# Altium PCB 88E1512_1000M_SFP_1027.PcbDoc (part 2 of 2)
Units mm, origin at the board's own origin, x right, y up, seen from the top; angles counter-clockwise.
Board outline 50 x 100 mm, 2 copper layers (Top Layer, Bottom Layer); 170 components, 153 nets, 597 pads, 463 vias.
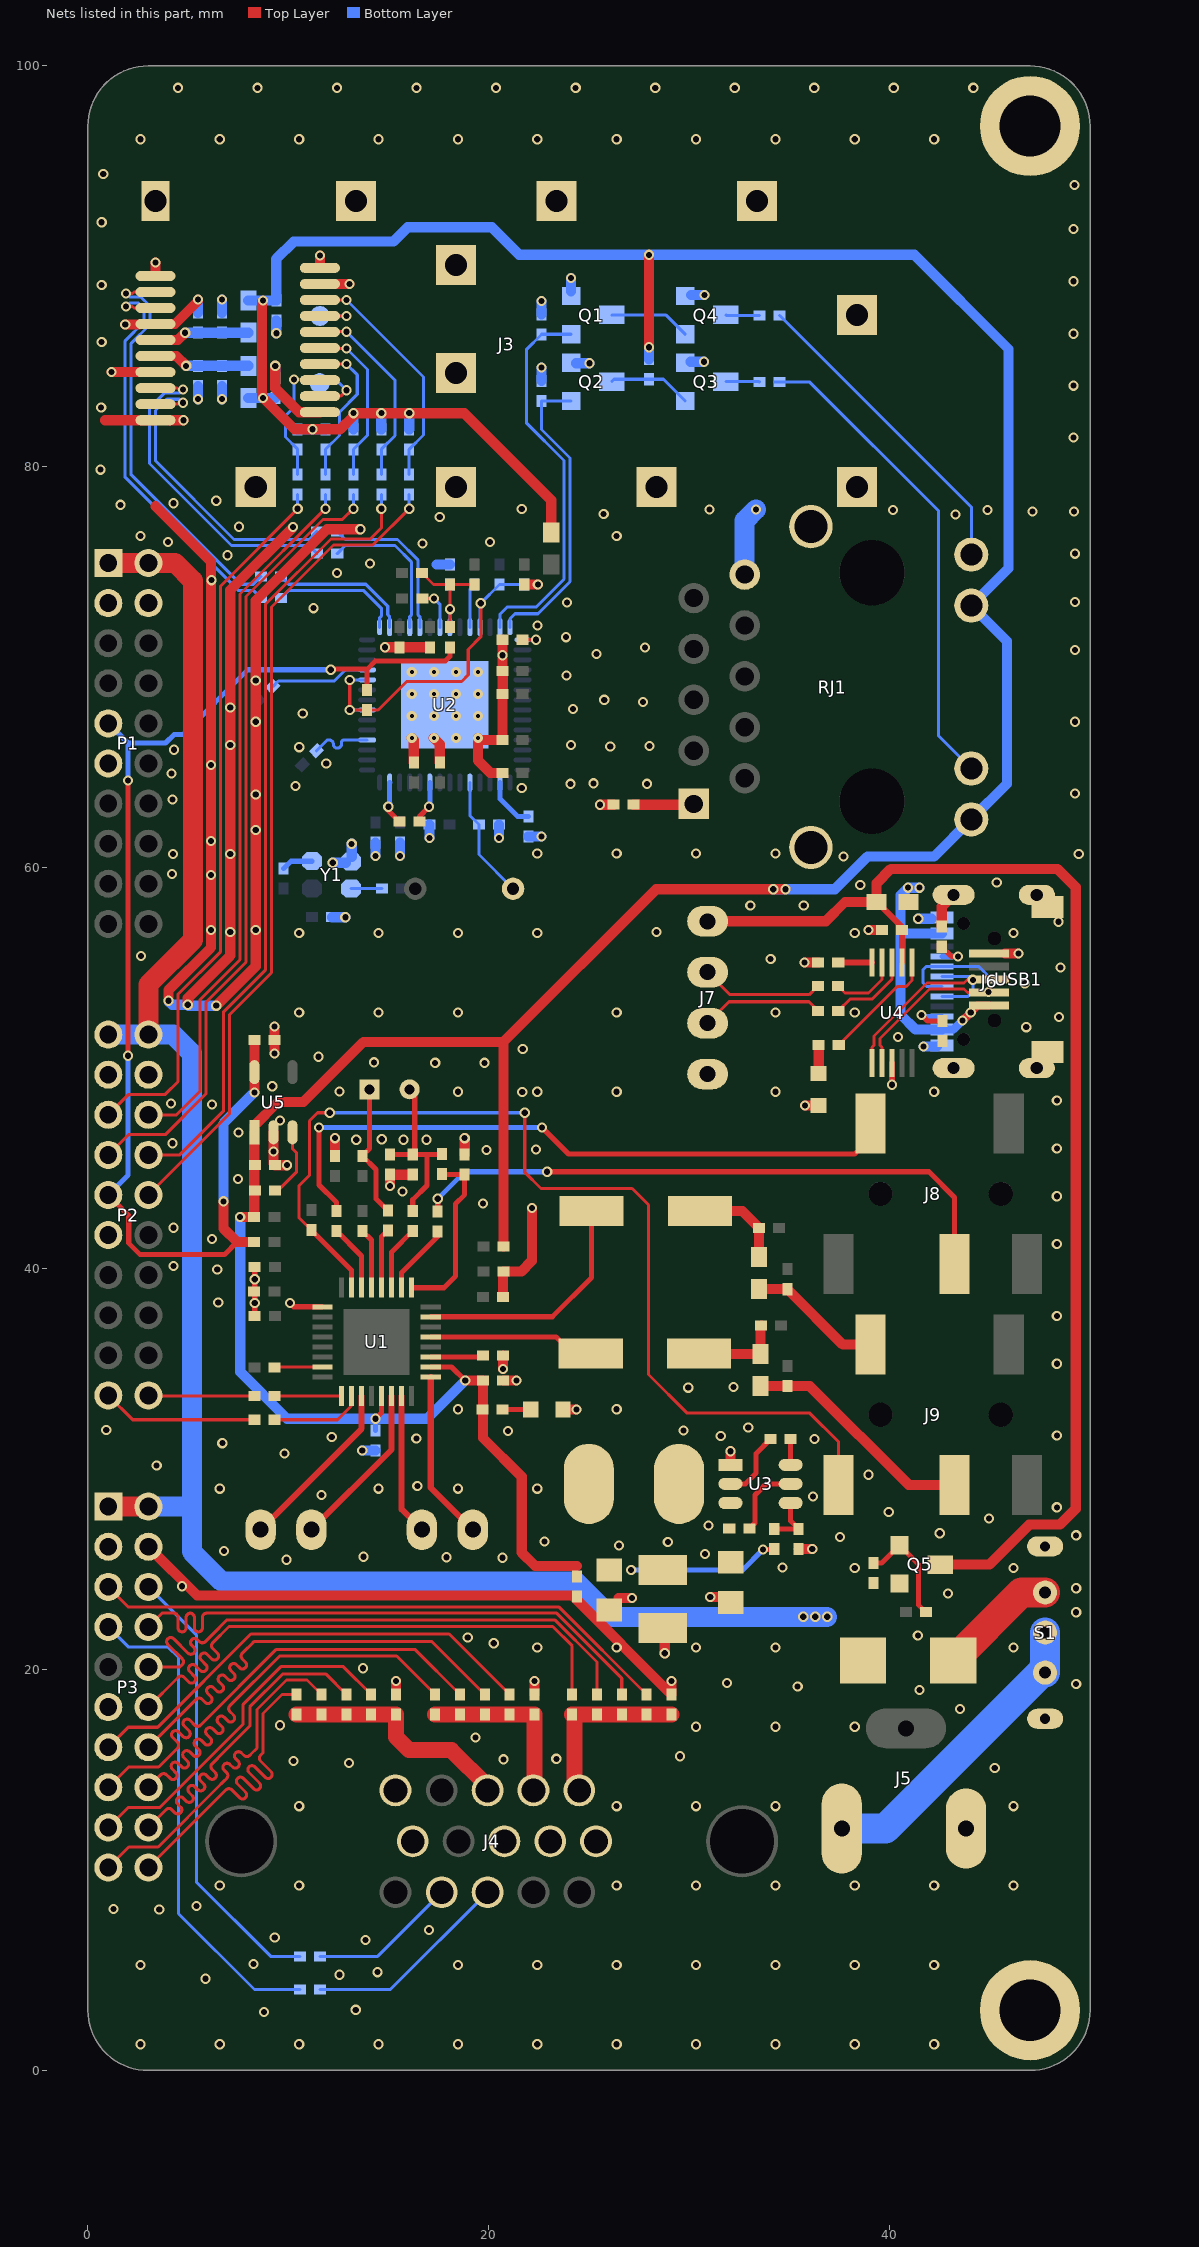
[diagram p2: the nets of this part, all layers, seen from the top]

## Via types
v1: diameter 0.508, hole 0.305, Top Layer to Bottom Layer, tented both sides, 447 vias
v2: diameter 0.5, hole 0.2, Top Layer to Bottom Layer, tented both sides, 16 vias

## Nets (pads, with @x,y where several pads share a name; then routed paths per layer and width w, separated by ;. In a path a pad name is that pad's centre, name@x,y a point inside that pad or via, vN(x,y) a via of type N, cw(c..) or ccw(c..) an arc to the next point about the centre after c; other vN are vias at no path point) (continued)
GND: C1.2 C2.2 C3.2 C4.1 C5.1 C6.1 C12.1 C13.1 C18.1 C19.1 C23.1 C24.1 C25.1 C26.1 C28.1 C29.1 C30.1 C31.1 C32.1 C33.1 C34.1 C35.2 C36.2 C37.1 C38.1 C40.1 C41.1 C43.2 C44.2 C45.1 C46.2 C47.2 C48.1 C49.2 C50.2 C51.1 C52.1 C53.1 C54.1 D2.2 D3.2 H1.1 H2.1 J3.0 J3.1 J3.9 J3.10 J3.11 J3.14 J3.17 J3.20 J4.5 J4.6 J4.7 J4.8 J4.10 J5.2 J6.1 J6.2 J6.3 J6.4 J6.A1B12 J6.B1A12 J7.4 P1.3 P1.4 P1.11 P2.3 P2.4 P2.11 P3.3 P3.4 P3.11 Q1.2 Q2.2 Q3.2 Q4.2 R2.1 R10.2 R20.1 R23.1 R26.1 R44.1 R45.1 R51.1 R52.1 R53.2 R60.1 R62.1 R63.1 RJ1.P10 RJ1.SHIELD0 RJ1.SHIELD1 S1.0 U1.9 U2.57 U3.1 U4.3 U5.2 USB1.5 USB1.6 USB1.7 Y1.2 | length 192.3
  Top Layer w0.254: C6.1@8.322,37.643 v1(8.322,38.278) v1(8.322,39.472) C4.1@8.322,40.081 ; v1(10.084,38.278) 10.264,38.097 U1.9@11.702,38.097
  Top Layer w0.3: v1(40.107,49.174) 40.107,49.124 40.116,49.114 U4.3@40.116,50.267
  Top Layer w0.508: 0.866,82.324 J3.20@3.372,82.324 ; v1(1.183,84.724) J3.17@3.372,84.724 ; v1(1.864,87.097) J3.14@2.54,87.097 ; P3.4@3.016,26.125 5.443,23.698 24.165,23.698 R20.1@29.108,18.755 v1(29.108,19.431) ; 3.372,78.035 6.138,75.269 v1(6.138,65.126) ; J3.14@3.372,87.124 4.345,87.124 5.491,88.269 v1(5.491,88.355) ; J3.11@3.372,89.524 v1(3.372,90.2) ; v1(4.013,53.365) 4.013,53.888 6.138,56.013 v1(6.138,56.896) v1(6.138,59.639) v1(6.138,61.341) v1(6.138,65.126) ; J3.20@4.089,82.321 v1(4.766,82.321) ; v1(4.978,53.162) 4.978,53.489 7.102,55.613 v1(7.102,56.794) v1(7.102,60.681) v1(7.102,66.116) v1(7.102,67.996) ; v1@6.138,65.176 v1(6.138,65.126) ; v1(6.401,53.119) 8.37,55.088 v1(8.37,56.896) v1(8.37,61.874) v1(8.37,63.652) ; v1@7.102,68.174 v1(7.102,67.996) ; v1@8.37,63.779 v1(8.37,63.652) ; v1@9.254,46.025 v1(9.254,45.847) ; U5.2@9.254,46.803 v1(9.254,45.847) ; v1(9.306,50.733) C50.2@9.306,51.41 v1(9.306,52.086) ; v1(9.347,85.039) 9.347,83.922 10.545,82.724 J3.1@11.572,82.724 ; v1(9.931,45.161) C49.2@9.331,45.161 9.254,45.238 v1(9.254,45.847) ; v1(10.236,76.992) 7.102,73.858 v1(7.102,67.996) ; J3.9@11.572,89.124 11.576,89.129 v1(13.056,89.129) ; J3.10@11.572,89.924 v1(11.572,90.54) ; R10.2@12.319,45.61 v1(12.319,46.507) ; v1(13.59,76.886) 11.924,76.886 8.37,73.333 v1(8.37,69.342) v1(8.37,67.285) v1(8.37,63.652) ; v1(14.813,70.998) C30.1@15.555,70.998 C32.1@17.055,70.998 ; v1(15.062,44.12) R2.1@15.062,44.687 C3.2@16.205,44.687 ; R26.1@15.367,18.755 v1(15.367,19.431) ; v2(16.155,66.473) 16.256,66.372 C31.1@16.256,65.245 ; v2(17.255,66.473) 17.555,66.173 C53.1@17.555,65.248 ; C2.2@18.796,45.704 v1(18.796,46.507) ; R51.1@20.68,71.373 v1(20.68,70.6) 20.68,69.828 C28.1@20.684,69.825 20.692,69.817 C54.1@20.692,68.656 20.68,68.645 C40.1@20.68,66.373 19.555,66.373 v2(19.455,66.473) 19.455,65.355 20.091,64.719 C29.1@20.684,64.719 ; C51.1@20.71,34.417 v1(21.387,34.417) ; v1(20.71,34.985) C1.2@20.71,35.662 ; C12.1@20.71,38.583 20.71,39.827 C13.1@20.736,39.853 21.615,39.853 22.149,40.386 v1(22.149,43.028) ; C41.1@21.768,74.125 v1(22.444,74.125) ; R23.1@22.276,18.755 v1(22.276,19.431) ; D2.2@23.698,32.969 v1(24.375,32.969) ; v1(25.544,63.144) C36.2@26.221,63.144 ; 26.467,23.571 v1(27.143,23.571) ; v1(28.778,20.812) C46.2@28.778,21.488 ; v1(31.048,23.622) C43.2@31.725,23.622 ; U3.1@32.055,30.211 v1(32.055,30.887) ; R60.1@35.458,26.018 v1(36.135,26.018) ; v1(35.755,55.27) C47.2@36.432,55.27 ; v1(35.773,48.133) D3.2@36.449,48.133 ; v1(38.938,56.896) C48.1@39.615,56.896 ; R62.1@42.596,57.058 42.596,58.053 J6.1@43.188,58.645 ; USB1.5@45.745,55.728 v1(46.422,55.728)
  Bottom Layer w0.508: v1(4.013,53.365) 4.013,53.34 4.191,53.162 v1(4.978,53.162) 5.022,53.119 v1(6.401,53.119) ; v1(5.491,83.375) C26.1@5.491,84.039 ; C19.1@5.491,87.69 v1(5.491,88.355) ; v1(6.694,83.375) C25.1@6.694,84.039 ; C18.1@6.694,87.69 v1(6.694,88.355) ; C24.1@9.347,84.439 v1(9.347,85.039) ; v1(9.398,86.665) C23.1@9.398,87.29 ; C35.2@12.176,57.531 v1(12.841,57.531) ; v1(12.213,60.249) Y1.2@12.878,60.249 ; Y1.2@13.157,60.528 v1(13.157,61.193) ; v1(13.686,30.928) C52.1@14.351,30.928 ; v1(14.351,60.591) C34.1@14.351,61.255 ; v1(15.57,60.591) C33.1@15.57,61.255 ; v1(17.034,61.489) C37.1@17.034,62.154 ; 17.395,75.125 R53.2@18.059,75.125 ; v1(20.507,61.489) C38.1@20.507,62.154 ; R52.1@21.971,61.56 v1(22.636,61.56) ; R44.1@22.631,84.287 v1(22.631,84.951) ; R45.1@22.631,87.605 v1(22.631,88.269) ; Q1.2@24.105,88.748 v1(24.105,89.412) ; Q2.2@24.359,85.166 v1(25.023,85.166) ; Q3.2@30.074,85.242 v1(30.738,85.242) ; Q4.2@30.099,88.57 v1(30.764,88.57) ; v1(41.423,57.455) J6.A1B12@42.088,57.455 ; v1(41.677,51.079) J6.B1A12@42.342,51.079
  Bottom Layer w1: RJ1.P10@32.766,74.625 32.766,77.318 v1(33.325,77.876)
  other v1: 2.618,1.303 6.578,1.303 10.538,1.303 14.498,1.303 18.458,1.303 22.418,1.303 26.378,1.303 30.338,1.303 34.298,1.303 38.258,1.303 42.218,1.303 8.788,2.921 13.36,3.023 5.867,4.572 12.548,4.775 14.453,4.902 2.618,5.263 18.458,5.263 22.418,5.263 26.378,5.263 30.338,5.263 34.298,5.263 38.258,5.263 42.218,5.263 8.255,5.309 13.843,6.502 9.322,6.629 17.018,7.01 3.556,8.026 1.27,8.052 5.41,8.204 6.578,9.223 10.538,9.223 26.378,9.223 30.338,9.223 34.298,9.223 38.258,9.223 42.218,9.223 46.178,9.223 10.538,13.183 26.378,13.183 30.338,13.183 34.298,13.183 46.178,13.183 45.237,15.088 13.03,15.342 10.262,15.443 20.726,15.519 23.368,15.545 29.54,15.672 19.329,16.612 30.338,17.143 34.298,17.143 38.258,17.143 9.576,17.221 43.51,18.034 41.478,18.974 35.408,19.152 49.301,19.279 31.877,19.329 13.716,20.066 22.418,21.103 26.378,21.103 30.338,21.103 34.298,21.103 46.178,21.103 20.244,21.311 18.948,21.59 41.402,21.692 49.301,22.86 42.904,23.797 49.301,24.054 4.699,24.155 38.258,25.063 46.178,25.063 34.646,25.095 9.906,25.476 20.676,25.578 17.882,25.603 13.741,25.629 30.785,25.756 6.782,25.908 26.492,26.187 28.931,26.365 22.784,26.391 37.516,26.619 49.301,26.695 42.494,26.797 30.963,27.178 44.958,27.534 39.954,27.864 48.336,28.092 36.17,28.626 11.659,28.702 6.578,29.023 14.498,29.023 18.458,29.023 22.418,29.023 16.434,29.159 38.938,29.718 3.429,30.175 9.804,30.785 6.706,31.293 36.246,31.496 16.383,31.521 12.167,31.598 31.572,31.648 48.336,31.674 20.955,31.902 29.718,31.928 0.914,31.953 32.944,32.08 18.458,32.983 26.378,32.983 29.947,34.061 32.207,34.087 48.336,35.255 48.336,37.643 6.502,38.303 6.452,39.954 4.267,40.132 48.336,41.224 6.198,41.478 4.267,42.037 19.71,43.256 48.336,43.612 15.697,43.84 7.493,44.475 19.888,45.923 22.352,45.949 48.336,45.999 4.216,46.253 13.386,46.431 15.748,46.431 16.891,46.431 14.656,46.457 7.518,46.787 9.576,47.396 6.198,48.184 4.14,48.235 48.336,48.387 18.458,48.823 21.666,48.819 22.418,48.823 26.378,48.823 34.298,48.823 42.218,48.823 12.548,48.844 9.195,49.098 17.323,50.267 19.787,50.267 14.275,50.292 11.506,50.571 21.692,50.952 40.411,51.562 46.812,52.045 48.438,52.553 10.538,52.783 14.498,52.783 18.458,52.783 26.378,52.783 34.298,52.783 38.258,52.783 46.736,54.229 48.514,55.016 34.061,55.448 2.642,55.601 10.538,56.743 14.498,56.743 18.458,56.743 22.418,56.743 38.258,56.743 46.178,56.743 28.372,56.794 48.412,57.302 33.045,58.115 35.712,58.115 38.532,59.131 45.339,59.258 4.191,59.69 37.694,60.554 4.242,60.681 49.428,60.681 22.418,60.703 26.378,60.703 30.338,60.703 34.298,60.703 4.216,63.398 49.251,63.703 21.641,63.983 10.363,64.084 24.079,64.186 27.889,64.186 25.222,64.211 4.166,64.694 11.887,65.202 4.293,65.888 10.541,66.015 26.06,66.04 28.016,66.065 24.105,66.116 49.251,67.285 10.719,67.691 24.206,67.92 27.686,68.275 25.756,68.377 23.876,69.596 25.375,70.663 49.251,70.866 27.788,70.993 23.851,71.501 22.428,72.085 11.252,72.949 23.901,73.228 49.251,73.254 6.172,74.346 12.421,74.701 14.072,75.184 6.96,75.59 49.251,75.667 16.688,76.175 3.988,76.251 20.066,76.251 2.618,76.543 26.378,76.543 7.544,77.013 17.551,77.495 43.282,77.622 25.73,77.648 47.117,77.775 49.2,77.775 40.157,77.851 44.882,77.851 31.013,77.876 21.641,77.902 1.626,78.105 4.267,78.181 6.401,78.308 0.635,79.858 49.174,81.458 0.66,82.956 49.174,84.049 0.686,86.233 49.174,86.639 0.686,89.078 49.174,89.256 49.174,91.872 0.686,92.202 49.225,94.056 0.762,94.615 2.618,96.343 6.578,96.343 10.538,96.343 14.498,96.343 18.458,96.343 22.418,96.343 26.378,96.343 30.338,96.343 34.298,96.343 38.258,96.343 42.218,96.343 4.496,98.908 8.463,98.908 12.431,98.908 16.398,98.908 20.366,98.908 24.333,98.908 28.301,98.908 32.268,98.908 36.236,98.908 40.203,98.908 44.171,98.908
  other v2: 18.355,66.473 16.155,67.573 17.255,67.573 18.355,67.573 19.455,67.573 16.155,68.673 17.255,68.673 18.355,68.673 19.455,68.673 16.155,69.773 17.255,69.773 18.355,69.773 19.455,69.773
HP_JD: J9.6 R6.1 U1.7 | length 51.8
  Top Layer w0.152: R6.1@11.151,41.918 10.52,42.549 10.52,44.124 11.049,44.653 11.049,47.371 11.455,47.777 v1(12.065,47.777) ; v1(21.793,47.777) 21.793,44.806 22.606,43.993 27.153,43.993 27.965,43.18 27.965,34.722 29.896,32.791 36.017,32.791 37.438,31.371 J9.6@37.438,29.21
  Top Layer w0.254: R6.1@11.151,41.918 13.152,39.917 U1.7@13.152,39.047
  Bottom Layer w0.152: v1(12.065,47.777) v1(21.793,47.777)
IIC1_SCL: P2.20 R75.2 | length 5.3
  Top Layer w0.152: P2.20@3.016,33.675 3.036,33.655 R75.2@8.314,33.655
IIC1_SDA: P2.19 R76.2 | length 7.8
  Top Layer w0.152: P2.19@1.016,33.675 2.23,32.461 R76.2@8.314,32.461
LED_G: R40.1 RJ1.12 | length 24.4
  Bottom Layer w0.152: R40.1@34.257,84.226 R40.1@34.511,84.226 36.017,84.226 42.443,77.8 42.443,66.576 RJ1.12@44.069,64.95
LED_Y: R41.1 RJ1.14 | length 15.9
  Bottom Layer w0.152: R41.1@34.511,87.554 44.069,77.995 RJ1.14@44.069,75.618
NetC1_1: C1.1 U1.27 | length 2.6
  Top Layer w0.254: U1.27@17.102,35.597 19.646,35.597 C1.1@19.71,35.662
NetC2_1: C2.1 R4.2 U1.1 | length 8.9
  Top Layer w0.254: U1.1@16.152,39.047 17.762,39.047 18.339,39.624 18.339,43.231 18.796,43.688 C2.1@18.796,44.704 R4.2@17.551,44.704
NetC3_1: C3.1 C7.1 MIC1.2 R2.2 R4.1 | length 9
  Top Layer w0.254: R2.2@15.062,45.687 C3.1@16.205,45.687 C3.1@16.307,45.687 ; MIC1.2@16.046,48.946 16.307,48.685 C3.1@16.307,45.687 ; C7.1@16.205,42.885 16.205,43.434 16.92,44.149 16.92,45.687 ; R4.1@17.551,45.704 17.534,45.687 16.92,45.687 ; C3.1@16.307,45.687 16.92,45.687
NetC7_2: C7.2 U1.3 | length 3.3
  Top Layer w0.254: U1.3@15.152,39.047 15.152,40.831 C7.2@16.205,41.885
NetC8_1: C8.1 MIC1.1 R3.1 | length 6.7
  Top Layer w0.254: MIC1.1@14.046,48.946 14.046,45.983 R3.1@13.691,45.628 14.376,44.942 14.376,43.485 C8.1@14.961,42.901
NetC8_2: C8.2 U1.4 | length 3
  Top Layer w0.254: U1.4@14.652,39.047 14.652,41.592 C8.2@14.961,41.901
NetC9_1: C9.1 J8.2 | length 33.6
  Top Layer w0.254: v1(11.532,47.041) 11.532,44.171 12.395,43.307 C9.1@12.395,42.885 ; v1(22.657,47.041) 23.978,45.72 38.252,45.72 39.038,46.505 J8.2@39.038,47.234
  Bottom Layer w0.254: v1(11.532,47.041) v1(22.657,47.041)
NetC9_2: C9.2 U1.6 | length 3.4
  Top Layer w0.254: C9.2@12.395,41.885 13.652,40.628 U1.6@13.652,39.047
NetC10_2: C10.2 U1.5 | length 3
  Top Layer w0.254: C10.2@13.691,41.885 14.152,41.423 U1.5@14.152,39.047
NetC11_1: C11.1 J8.5 | length 30.8
  Top Layer w0.254: C11.1@17.45,42.859 v1(17.45,43.485) ; v1(22.911,44.831) 41.961,44.831 43.238,43.554 J8.5@43.238,40.234
  Bottom Layer w0.254: v1(17.45,43.485) 18.796,44.831 v1(22.911,44.831)
NetC11_2: C11.2 U1.2 | length 3.6
  Top Layer w0.254: U1.2@15.652,39.047 15.652,39.807 17.45,41.605 C11.2@17.45,41.859
NetC14_1: C14.1 U1.31 | length 12.2
  Top Layer w0.254: U1.31@17.102,37.597 23.17,37.597 25.131,39.558 C14.1@25.131,42.875
NetC14_2: C14.2 FB1.1 R9.2 | length 4.7
  Top Layer w0.508: C14.2@30.531,42.875 32.639,42.875 R9.2@33.477,42.037 FB1.1@33.477,40.589
NetC15_1: C15.1 U1.29 | length 8.3
  Top Layer w0.254: U1.29@17.102,36.597 23.347,36.597 24.181,35.763 C15.1@25.088,35.763
NetC15_2: C15.2 FB2.1 R8.2 | length 4.5
  Top Layer w0.508: C15.2@30.488,35.763 30.513,35.738 FB2.1@33.553,35.738 33.553,37.127 R8.2@33.587,37.16
NetC16_2: C16.2 FB2.2 J9.5 | length 11.7
  Top Layer w0.508: FB2.2@33.553,34.138 C16.2@34.9,34.138 36.017,34.138 40.945,29.21 J9.5@43.238,29.21
NetC17_2: C17.2 FB1.2 J9.2 | length 6.7
  Top Layer w0.508: FB1.2@33.477,38.989 34.882,38.989 C17.2@34.9,38.972 37.661,36.21 J9.2@39.038,36.21
NetC36_1: C36.1 RJ1.P1 | length 3
  Top Layer w0.508: C36.1@27.221,63.144 30.183,63.144 RJ1.P1@30.22,63.182
NetC38_2: C38.2 CY1.1 U2.33 | length 6.2
  Bottom Layer w0.152: U2.33@19.055,64.248 19.055,62.606 C38.2@19.507,62.154 19.507,60.655 CY1.1@21.209,58.953
NetC39_1: C39.1 U2.37 | length 2.3
  Top Layer w0.254: C39.1@16.535,62.306 16.535,62.56 v1(17.018,63.043)
  Bottom Layer w0.254: v1(17.018,63.043) 17.07,63.043 17.145,63.118 17.055,63.207 U2.37@17.055,64.248
NetC39_2: C39.2 U2.41 | length 2.2
  Top Layer w0.254: v1(14.986,63.043) 14.986,62.856 C39.2@15.535,62.306
  Bottom Layer w0.254: v1(14.986,63.043) 15.055,63.112 15.055,63.21 15.037,63.228 15.037,64.23 U2.41@15.055,64.248
NetC42_1: C42.1 U3.6 | length 1.3
  Top Layer w0.254: C42.1@35.052,31.496 35.055,31.493 U3.6@35.055,30.211
NetC42_2: C42.2 L3.2 U3.2 | length 3.5
  Top Layer w0.254: U3.2@32.055,29.261 32.791,29.261 33.325,29.794 33.325,30.769 C42.2@34.052,31.496
NetC47_1: C47.1 U4.10 | length 1.7
  Top Layer w0.305: C47.1@37.432,55.27 37.435,55.267 U4.10@39.116,55.267
NetD1_1: D1.1 S1.3 | length 6
  Top Layer w1.5: D1.1@43.169,20.447 46.566,23.844 S1.3@47.752,23.844
NetD2_1: D2.1 R61.2 | length 1.4
  Top Layer w0.254: R61.2@20.693,32.969 D2.1@22.098,32.969
NetD3_1: D3.1 R66.1 | length 1.4
  Top Layer w0.508: D3.1@36.449,49.733 36.457,49.741 R66.1@36.457,51.156
NetJ3_2: J3.2 T1.1 | length 2.9
  Top Layer w0.152: J3.2@11.572,83.524 12.607,83.524 v1(12.903,83.82)
  Bottom Layer w0.152: T1.1@11.557,84.176 12.548,84.176 v1(12.903,83.82)
NetJ3_3: J3.3 R14.1 R15.1 | length 6.5
  Top Layer w0.152: v1(10.287,84.353) 11.542,84.353 J3.3@11.572,84.324
  Bottom Layer w0.152: v1(10.287,84.353) 10.287,82.982 9.855,82.55 9.855,81.483 R14.1@10.465,80.874 R15.1@10.465,79.621
NetJ3_4: J3.4 R11.1 R18.1 | length 7.7
  Top Layer w0.152: J3.4@11.572,85.124 v1(12.899,85.124)
  Bottom Layer w0.152: R18.1@11.855,79.621 R11.1@11.855,80.874 12.548,81.566 12.548,82.728 13.437,83.617 13.437,84.586 v1(12.899,85.124)
NetJ3_5: J3.5 R12.1 R21.1 | length 8.3
  Top Layer w0.152: J3.5@11.572,85.924 11.593,85.903 v1(12.899,85.903)
  Bottom Layer w0.152: v1(12.899,85.903) 13.945,84.857 13.945,81.572 R12.1@13.246,80.874 R21.1@13.246,79.621
NetJ3_6: J3.6 R27.1 R73.1 | length 9.7
  Top Layer w0.152: J3.6@11.572,86.724 11.58,86.716 11.606,86.741 v1(12.899,86.741)
  Bottom Layer w0.152: v1(12.899,86.741) 15.316,84.324 15.316,81.553 R73.1@14.637,80.874 R27.1@14.637,79.621
NetJ3_7: J3.7 T2.1 | length 2.7
  Top Layer w0.152: J3.7@11.572,87.524 v1(12.899,87.524)
  Bottom Layer w0.152: T2.1@11.572,87.524 v1(12.899,87.524)
NetJ3_8: J3.8 R13.1 R28.1 | length 11.9
  Top Layer w0.152: J3.8@11.572,88.324 v1(12.899,88.324)
  Bottom Layer w0.152: v1(12.899,88.324) 16.739,84.484 16.739,81.585 R13.1@16.027,80.874 R28.1@16.027,79.621
NetJ4_13: J4.13 R35.2 | length 10.4
  Bottom Layer w0.152: R35.2@11.574,4.039 15.088,4.039 J4.13@19.939,8.89
NetJ4_14: J4.14 R39.2 | length 7.4
  Bottom Layer w0.152: R39.2@11.582,5.69 14.453,5.69 J4.14@17.653,8.89
NetJ5_1: J5.1 S1.1 S1.2 | length 15.4
  Bottom Layer w1.5: J5.1@37.608,12.065 39.776,12.065 47.555,19.844 S1.1@47.752,19.844 S1.2@47.752,21.844
NetJ6_A5: J6.A5 R62.2 | length 1.8
  Top Layer w0.254: R62.2@42.596,56.058 43.078,55.575 v1(43.412,55.575)
  Bottom Layer w0.254: J6.A5@42.613,55.575 v1(43.412,55.575)
NetJ6_B5: J6.B5 R63.2 | length 2.2
  Top Layer w0.254: v1(41.58,52.654) 41.885,52.349 R63.2@42.621,52.349
  Bottom Layer w0.254: v1(41.58,52.654) 41.659,52.575 J6.B5@42.613,52.575
NetQ1_3: Q1.3 Q4.1 R37.1 | length 4.1
  Bottom Layer w0.152: Q1.3@26.137,87.579 26.153,87.563 R37.1@27.991,87.563 28.845,87.563 Q4.1@29.794,86.614
NetQ2_3: Q2.3 Q3.1 R36.1 | length 4.2
  Bottom Layer w0.152: Q2.3@26.137,84.252 26.254,84.369 R36.1@27.991,84.369 28.711,84.369 Q3.1@29.794,83.287
NetQ3_3: Q3.3 R40.2 | length 1.7
  Bottom Layer w0.152: Q3.3@31.826,84.252 33.485,84.252 R40.2@33.511,84.226
NetQ4_3: Q4.3 R41.2 | length 1.7
  Bottom Layer w0.152: Q4.3@31.826,87.579 31.852,87.554 R41.2@33.511,87.554
NetQ5_1: Q5.1 R70.1 R71.1 | length 5.5
  Top Layer w0.254: R70.1@39.192,25.308 39.595,25.308 Q5.1@40.488,26.2 41.427,25.26 41.427,23.233 R71.1@41.8,22.86
NetR5_1: R5.1 U1.15 | length 2.4
  Top Layer w0.152: R5.1@9.314,35.077 9.334,35.097 U1.15@11.702,35.097
NetR43_1: R43.1 U2.53 | length 5.1
  Bottom Layer w0.152: R43.1@9.218,69.035 9.5,69.317 12.294,69.317 12.85,69.873 U2.53@13.93,69.873
NetR46_1: R46.1 U2.46 | length 3.2
  Bottom Layer w0.152: R46.1@11.403,65.835 11.938,66.37 12.04,66.37 cw(c12.04,66.167) 12.243,66.167 ccw(c12.446,66.167) 12.446,65.964 ccw(c12.446,66.167) 12.649,66.167 12.649,66.244 cw(c12.774,66.244) 12.774,66.37 13.927,66.37 U2.46@13.93,66.373
NetR47_1: R47.1 U2.7 | length 2.1
  Top Layer w0.152: R47.1@16.68,73.431 v1(17.272,73.431)
  Bottom Layer w0.152: v1(17.272,73.431) 17.555,73.148 U2.7@17.555,71.998
NetR48_1: R48.1 R49.1 R50.1 R68.1 U2.8 | length 5.9
  Top Layer w0.152: R48.1@16.662,74.701 17.239,74.125 R49.1@18.059,74.125 ; R68.1@18.055,71.998 v1(18.055,72.898) 18.055,74.121 R49.1@18.059,74.125 ; R50.1@19.296,74.125 R49.1@18.059,74.125
  Bottom Layer w0.152: U2.8@18.055,71.998 v1(18.055,72.898)
NetR51_2: R51.2 U2.15 | length 1.3
  Top Layer w0.152: R51.2@21.68,71.373 v1(22.353,71.373)
  Bottom Layer w0.152: U2.15@21.68,71.373 v1(22.353,71.373)
NetR52_2: R52.2 U2.30 | length 2.6
  Bottom Layer w0.254: U2.30@20.555,64.248 20.555,63.442 21.438,62.56 R52.2@21.971,62.56
NetR53_1: R53.1 R55.1 U2.10 | length 3.5
  Bottom Layer w0.152: R53.1@18.059,74.125 R55.1@19.296,74.125 19.055,73.885 U2.10@19.055,71.998
NetR54_1: R54.1 Y1.3 | length 1.5
  Bottom Layer w0.152: Y1.3@13.132,58.953 R54.1@14.664,58.953
NetR56_1: R56.1 R57.1 R69.1 U2.11 U2.49 U2.52 | length 17.5
  Top Layer w0.152: v1(13.061,69.373) v1(13.06,67.873) v1(13.06,67.873) R69.1@13.93,67.873 14.482,67.873 15.904,69.295 18.647,69.295 18.974,69.621 18.974,70.891 19.6,71.517 v1(19.6,73.193)
  Bottom Layer w0.152: v1(13.06,67.873) U2.49@13.93,67.873 ; v1(13.061,69.373) U2.52@13.93,69.373 ; U2.11@19.555,71.998 19.555,73.149 v1(19.6,73.193) R56.1@20.532,74.125 R57.1@21.768,74.125
NetR58_2: R58.2 U3.5 | length 3.8
  Top Layer w0.254: R58.2@32.995,27.026 33.274,27.305 33.274,28.702 33.833,29.261 U3.5@35.055,29.261
NetR59_2: R59.2 R60.2 U3.4 | length 2.7
  Top Layer w0.254: R59.2@34.239,27.018 R60.2@35.458,27.018 35.055,27.421 U3.4@35.055,28.311
NetR64_2: R64.2 U4.9 | length 3.5
  Top Layer w0.152: R64.2@37.414,54.102 37.77,53.746 38.938,53.746 39.616,54.424 U4.9@39.616,55.267
NetR65_2: R65.2 U4.8 | length 4.2
  Top Layer w0.152: R65.2@37.432,52.857 38.017,53.442 39.117,53.442 40.116,54.442 U4.8@40.116,55.267
NetR66_2: R66.2 U4.6 | length 5.9
  Top Layer w0.152: R66.2@37.457,51.156 40.378,54.077 40.818,54.077 41.116,54.375 U4.6@41.116,55.267
NetR72_1: R72.1 Y1.1 | length 1.6
  Bottom Layer w0.254: R72.1@9.754,59.953 10.125,60.325 Y1.1@11.176,60.325
NetR74_2: R74.2 U5.3 | length 3.5
  Top Layer w0.152: R74.2@9.331,43.891 9.474,43.891 10.413,44.83 10.413,45.771 10.204,45.981 U5.3@10.204,46.803
NetR75_1: R75.1 U1.17 | length 3.3
  Top Layer w0.152: R75.1@9.314,33.655 9.321,33.647 U1.17@12.652,33.647
NetR76_1: R76.1 U1.18 | length 4.6
  Top Layer w0.152: R76.1@9.314,32.461 12.446,32.461 13.132,33.147 13.132,33.627 U1.18@13.152,33.647
PHY_LED0: Q1.1 R45.2 U2.13 | length 19.3
  Bottom Layer w0.152: U2.13@20.555,71.998 20.555,72.651 20.904,73 22.352,73 23.75,74.397 23.75,80.316 21.869,82.196 21.869,85.843 R45.2@22.631,86.605 22.641,86.614 Q1.1@24.105,86.614
PHY_LED1: Q2.1 R44.2 U2.14 | length 15.3
  Bottom Layer w0.152: U2.14@21.055,71.998 21.055,72.414 21.311,72.669 22.454,72.669 24.054,74.27 24.054,80.442 22.631,81.864 R44.2@22.631,83.287 Q2.1@24.105,83.287
S_IN_N: C27.1 U2.2 | length 7
  Bottom Layer w0.152: C27.1@9.636,74.524 10.018,74.142 13.865,74.142 14.957,73.049 14.957,72.622 15.055,72.524 U2.2@15.055,71.998
S_IN_P: C22.1 U2.1 | length 6.5
  Bottom Layer w0.152: C22.1@9.636,73.457 10.017,73.838 13.739,73.838 14.653,72.923 14.653,72.572 14.555,72.474 U2.1@14.555,71.998
S_OUT_N: C20.1 U2.5 | length 8
  Bottom Layer w0.152: C20.1@12.438,76.784 12.845,76.377 15.442,76.377 16.457,75.362 16.457,72.622 16.555,72.524 U2.5@16.555,71.998
S_OUT_P: C21.1 U2.4 | length 7.5
  Bottom Layer w0.152: C21.1@12.438,75.667 12.845,76.073 15.316,76.073 16.153,75.236 16.153,72.622 16.055,72.524 U2.4@16.055,71.998
SFP_DETECT: P2.8 R27.2 | length 39.8
  Top Layer w0.152: P2.8@3.016,45.675 4.586,45.675 6.756,47.845 6.756,52.793 8.852,54.889 8.852,73.133 12.123,76.403 14.091,76.403 14.637,76.949 v1(14.637,77.91)
  Bottom Layer w0.152: v1@14.637,77.902 v1(14.637,77.91) R27.2@14.637,78.621
SFP_LOS: P2.10 R28.2 | length 41.5
  Top Layer w0.152: P2.10@3.016,43.675 7.06,47.719 7.06,52.667 9.156,54.763 9.156,73.007 12.249,76.099 14.217,76.099 v1(16.027,77.91)
  Bottom Layer w0.152: v1@16.027,77.902 v1(16.027,77.91) R28.2@16.027,78.621
SFP_SCL: P2.7 R21.2 | length 39.7
  Top Layer w0.152: P2.7@1.016,45.675 2.026,46.685 3.859,46.685 5.892,48.718 5.892,53.291 7.888,55.288 7.888,73.532 11.725,77.368 12.692,77.368 v1@13.233,77.91
  Bottom Layer w0.152: v1@13.246,77.902 v1(13.246,77.91) R21.2@13.246,78.621
SFP_SDA: P2.6 R18.2 | length 35.4
  Top Layer w0.152: P2.6@3.016,47.675 4.419,47.675 5.588,48.844 5.588,53.417 7.584,55.414 7.584,73.658 v1@11.836,77.91
  Bottom Layer w0.152: v1@11.855,77.902 v1(11.855,77.91) R18.2@11.855,78.621
SFP_TX_DISABLE: P2.5 R15.2 | length 35.9
  Top Layer w0.152: P2.5@1.016,47.675 2.033,48.692 3.861,48.692 4.495,49.326 4.495,53.688 6.62,55.813 6.62,74.057 v1@10.465,77.902
  Bottom Layer w0.152: v1@10.465,77.902 v1(10.465,77.91) R15.2@10.465,78.621
SIN_N: C27.2 J3.12 | length 20.7
  Top Layer w0.152: v1(1.905,88.654) 2.226,88.654 2.296,88.724 J3.12@3.372,88.724
  Bottom Layer w0.152: v1(1.905,88.654) 2.083,88.476 2.641,88.476 3.098,88.019 3.098,87.098 2.159,86.159 2.159,79.604 7.62,74.142 8.255,74.142 C27.2@8.636,74.524
SIN_P: C22.2 J3.13 | length 20.7
  Top Layer w0.152: v1(1.905,87.994) 2.226,87.994 2.296,87.924 J3.13@3.372,87.924
  Bottom Layer w0.152: v1(1.905,87.994) 2.083,88.172 2.515,88.172 2.794,87.893 2.794,87.224 1.855,86.285 1.855,79.478 7.494,73.838 8.255,73.838 C22.2@8.636,73.457
SOUT_N: C20.2 J3.19 | length 15.5
  Top Layer w0.152: J3.19@3.372,83.124 4.448,83.124 4.518,83.194 v1(4.75,83.194)
  Bottom Layer w0.152: v1(4.75,83.194) 4.572,83.372 3.937,83.372 3.372,82.807 3.372,80.296 7.29,76.377 11.031,76.377 C20.2@11.438,76.784
SOUT_P: C21.2 J3.18 | length 16.5
  Top Layer w0.152: J3.18@3.372,83.924 4.448,83.924 4.518,83.854 v1(4.75,83.854)
  Bottom Layer w0.152: v1(4.75,83.854) 4.572,83.676 3.811,83.676 3.068,82.933 3.068,80.17 7.164,76.073 11.031,76.073 C21.2@11.438,75.667
SPK_LN: J1.2 U1.23 | length 7.1
  Top Layer w0.305: U1.23@15.652,33.647 15.652,27.985 J1.2@16.662,26.975
SPK_LP: J1.1 U1.25 | length 8.5
  Top Layer w0.305: U1.25@17.102,34.597 17.102,29.075 J1.1@19.202,26.975
SPK_RN: J2.2 U1.19 | length 8.8
  Top Layer w0.305: J2.2@8.611,26.975 13.652,32.016 U1.19@13.652,33.647
SPK_RP: J2.1 U1.22 | length 8.3
  Top Layer w0.305: J2.1@11.151,26.975 15.152,30.976 U1.22@15.152,33.647
UART_RXD: J7.3 R65.1 | length 6.2
  Top Layer w0.152: J7.3@30.912,52.248 31.979,53.315 35.974,53.315 R65.1@36.432,52.857
UART_TXD: J7.2 R64.1 | length 6.1
  Top Layer w0.152: J7.2@30.912,54.788 32.029,53.67 35.982,53.67 R64.1@36.414,54.102
USB_5V: FU1.1 J6.A4B9 J6.B4A9 USB1.1 | length 15
  Top Layer w0.4: v1(43.637,52.375) v1(44.044,52.781) 44.044,52.783 44.386,53.125 USB1.1@44.954,53.125
  Top Layer w0.508: FU1.1@40.919,58.318 FU1.1@40.945,58.293
  Bottom Layer w0.4: J6.B4A9@42.613,51.925 43.186,51.925 44.042,52.781 v1(44.044,52.781)
  Bottom Layer w0.508: v1(41.478,59.004) v1(40.919,59.004) 40.538,58.623 40.538,56.718 ; J6.B4A9@42.613,51.925 41.293,51.925 40.538,52.68 40.538,56.718 ; J6.A4B9@42.613,56.725 40.545,56.725 40.538,56.718
USB_UART_N: J6.A7 J6.B7 U4.2 USB1.2 | length 13.8
  Top Layer w0.152: U4.2@39.616,50.267 39.616,51.043 39.518,51.141 39.518,51.481 41.985,53.948 43.705,53.948 43.878,53.775 USB1.2@44.954,53.775 v1(44.933,53.796)
  Bottom Layer w0.152: J6.A7@42.613,54.075 41.835,54.075 41.656,54.254 41.656,54.915 41.816,55.075 J6.B7@42.613,55.075 44.442,55.075 44.933,54.585 v1(44.933,53.796)
USB_UART_P: J6.A6 J6.B6 U4.1 USB1.3 | length 12.1
  Top Layer w0.152: U4.1@39.116,50.267 39.116,51.043 39.214,51.141 39.214,51.607 41.859,54.252 43.705,54.252 43.878,54.425 USB1.3@44.954,54.425
  Bottom Layer w0.152: J6.B6@42.613,53.575 43.898,53.575 44.145,53.823 v1(44.145,54.407) 43.977,54.575 J6.A6@42.613,54.575
USB_VCC: C48.2 FU1.2 J7.1 Q5.3 U4.7 | length 62.9
  Top Layer w0.305: FU1.2@39.345,58.293 40.615,57.023 C48.2@40.615,56.896 40.616,56.895 U4.7@40.616,55.267
  Top Layer w0.508: J7.1@30.912,57.328 36.805,57.328 37.77,58.293 FU1.2@39.345,58.293 39.345,59.233 40.056,59.944 48.36,59.944 49.276,59.028 49.276,28.016 48.489,27.229 46.965,27.229 44.971,25.235 Q5.3@42.52,25.235
VCC_2.5: C50.1 P1.9 P2.9 R67.2 R68.2 R69.2 U5.5 | length 64.3
  Top Layer w0.254: P2.9@1.016,43.675 2.037,42.654 2.037,41.27 2.61,40.696 6.812,40.696 7.442,41.326 ; v1@1.981,64.338 v1(1.998,64.355) ; v1(2.007,50.622) v1@2.007,64.355 ; v1(12.116,69.875) 12.146,69.906 13.93,69.906 ; R69.2@13.93,68.873 13.93,69.906 ; R68.2@18.055,70.998 18.055,70.532 17.831,70.307 14.332,70.307 13.93,69.906
  Top Layer w0.508: v1(6.756,43.358) 6.756,42.012 7.442,41.326 R67.2@8.296,41.326 ; U5.5@8.304,49.803 8.304,51.408 C50.1@8.306,51.41 ; v1(8.306,48.793) U5.5@8.306,49.75
  Bottom Layer w0.254: P2.9@1.016,43.675 2.007,44.666 v1(2.007,50.622) ; P1.9@1.016,67.2 1.998,66.218 ; v1(1.998,64.355) 1.998,66.218 ; v1(12.116,69.875) 7.976,69.875 4.75,66.65 4.301,66.65 3.869,66.218 1.998,66.218
  Bottom Layer w0.508: v1(6.756,43.358) 6.756,47.244 v1(8.306,48.793)
VCC_3.3V: C23.2 C24.2 C44.1 C45.2 C46.1 C49.1 C51.2 C52.2 FB3.2 L1.1 L2.1 L3.1 R1.2 R7.2 R11.2 R12.2 R13.2 R14.2 R36.2 R37.2 R59.1 R61.1 R73.2 R74.1 RJ1.11 RJ1.13 U1.21 U1.26 U5.1 | length 208.8
  Top Layer w0.254: v1(14.351,32.512) 14.652,32.813 U1.21@14.652,33.647 ; U1.26@17.102,35.097 18.141,35.097 v1(18.821,34.417) ; v1(33.68,25.984) 34.206,25.984 R59.1@34.239,26.018
  Top Layer w0.508: v1(7.595,42.57) R1.2@8.296,42.57 8.296,46.795 U5.1@8.304,46.803 8.304,47.13 9.485,48.311 10.744,48.311 13.741,51.308 20.726,51.308 ; v1(8.738,88.29) 8.687,88.24 8.687,83.49 v1(8.738,83.439) 10.303,81.874 v1(11.201,81.874) 12.582,81.874 13.246,82.537 v1(13.246,82.677) v1(14.637,82.677) v1(16.027,82.677) 18.771,82.677 23.114,78.334 FB3.2@23.114,76.733 ; v1(18.821,34.417) C51.2@19.71,34.417 19.71,31.547 21.641,29.616 21.641,25.832 22.301,25.171 24.384,25.171 ; R7.2@20.736,41.097 20.726,41.107 20.726,51.308 ; L3.1@24.528,27.83 24.989,28.291 L3.1@24.989,29.261 ; v1(27.991,85.966) v1(27.991,90.576) ; v1(34.798,58.928) v1(34.188,58.928) 28.346,58.928 20.726,51.308
  Bottom Layer w0.254: C52.2@14.351,31.928 v1(14.351,32.512) ; v1(27.102,24.968) 32.664,24.968 v1(33.68,25.984)
  Bottom Layer w0.508: v1(7.595,42.57) 7.595,34.849 9.931,32.512 v1(14.351,32.512) 16.916,32.512 v1(18.821,34.417) ; L2.1@8.001,83.439 v1(8.738,83.439) C24.2@9.347,83.439 ; L1.1@8.001,88.29 v1(8.738,88.29) C23.2@9.398,88.29 9.398,90.373 10.262,91.237 15.24,91.237 15.951,91.948 20.142,91.948 21.514,90.576 v1(27.991,90.576) 41.224,90.576 45.923,85.877 45.923,74.933 RJ1.13@44.069,73.078 45.847,71.3 45.847,64.188 RJ1.11@44.069,62.41 42.212,60.554 38.887,60.554 37.262,58.928 v1(34.798,58.928) v1(34.188,58.928) ; R14.2@10.465,81.874 v1(11.201,81.874) R11.2@11.855,81.874 ; R12.2@13.246,81.874 v1(13.246,82.677) ; R73.2@14.637,81.874 v1(14.637,82.677) ; R13.2@16.027,81.874 v1(16.027,82.677) ; R36.2@27.991,85.369 v1(27.991,85.966) R37.2@27.991,86.563
VCC_12V: C43.1 D1.2 P1.1 P1.2 P2.1 P2.2 P3.1 P3.2 Q5.2 R58.1 R70.2 U3.3 | length 94.8
  Top Layer w1: P3.1@1.016,28.125 P3.2@3.016,28.125 ; P1.1@1.016,75.2 P1.2@3.016,75.2 4.353,75.2 5.232,74.32 5.232,56.388 3.016,54.172 P2.2@3.016,51.675
  Bottom Layer w1: P2.1@1.016,51.675 P2.2@3.016,51.675 4.256,51.675 5.182,50.749 5.182,28.125 ; P3.2@3.016,28.125 5.182,28.125 ; v1(36.881,22.631) v1(36.284,22.631) v1(35.687,22.631) 26.086,22.631 24.333,24.384 6.68,24.384 5.182,25.883 5.182,28.125
VCC_RX: C18.2 C19.2 J3.15 L1.2 | length 4.8
  Top Layer w0.508: J3.15@3.372,86.324 4.485,86.324 v1(4.851,86.69)
  Bottom Layer w0.508: v1(4.851,86.69) C19.2@5.491,86.69 C18.2@6.694,86.69 L1.2@8.001,86.69
VCC_TX: C25.2 C26.2 J3.16 L2.2 | length 4.8
  Top Layer w0.508: J3.16@3.372,85.524 4.417,85.524 v1(4.902,85.039)
  Bottom Layer w0.508: v1(4.902,85.039) C26.2@5.491,85.039 C25.2@6.694,85.039 L2.2@8.001,85.039
VGA_B: J4.3 R26.2 R33.1 R34.1 R38.1 R42.1 | length 11.9
  Top Layer w0.8: R33.1@10.414,17.755 R34.1@11.652,17.755 R38.1@12.89,17.755 R42.1@14.129,17.755 R26.2@15.367,17.755 15.367,16.637 16.027,15.977 18.136,15.977 19.939,14.173 J4.3@19.939,13.97
VGA_B1: P3.20 R33.2 | length 17.6
  Top Layer w0.152: P3.20@3.016,10.125 5.882,12.991 6.888,13.997 cw(c7.032,13.854) 7.175,13.997 7.571,13.601 ccw(c7.715,13.744) 7.858,13.601 ccw(c7.715,13.744) 7.858,13.888 7.462,14.284 cw(c7.606,14.428) 7.462,14.571 cw(c7.606,14.428) 7.749,14.571 8.271,14.05 ccw(c8.414,14.193) 8.558,14.05 ccw(c8.414,14.193) 8.558,14.337 8.036,14.858 cw(c8.18,15.002) 8.036,15.145 cw(c8.18,15.002) 8.324,15.145 8.845,14.624 ccw(c8.988,14.768) 9.132,14.624 ccw(c8.988,14.768) 9.132,14.911 8.611,15.433 cw(c8.754,15.576) 8.611,15.72 8.738,15.847 8.738,17.805 9.687,18.755 R33.2@10.414,18.755
VGA_B2: P3.19 R34.2 | length 17.6
  Top Layer w0.152: P3.19@1.016,10.125 2.042,11.151 3.505,11.151 6.464,14.11 6.778,14.423 6.921,14.567 ccw(c6.778,14.71) 6.921,14.854 6.796,14.979 cw(c6.939,15.123) 6.796,15.266 cw(c6.939,15.123) 7.083,15.266 7.208,15.141 ccw(c7.352,15.284) 7.495,15.141 ccw(c7.352,15.284) 7.495,15.428 7.37,15.553 cw(c7.513,15.697) 7.37,15.84 cw(c7.513,15.697) 7.657,15.84 7.782,15.715 ccw(c7.926,15.858) 8.07,15.715 8.213,15.858 8.357,16.002 8.433,16.078 8.433,18.009 9.906,19.482 10.925,19.482 R34.2@11.652,18.755
VGA_B3: P3.18 R38.2 | length 17.6
  Top Layer w0.152: P3.18@3.016,12.125 3.612,12.721 3.755,12.864 3.899,13.008 cw(c4.042,12.864) 4.186,13.008 4.336,12.858 ccw(c4.479,13.001) 4.623,12.858 ccw(c4.479,13.001) 4.623,13.145 4.473,13.295 cw(c4.616,13.438) 4.473,13.582 cw(c4.616,13.438) 4.76,13.582 4.91,13.432 ccw(c5.053,13.576) 5.197,13.432 ccw(c5.053,13.576) 5.197,13.719 5.047,13.869 cw(c5.191,14.012) 5.047,14.156 cw(c5.191,14.012) 5.334,14.156 5.484,14.006 ccw(c5.627,14.15) 5.771,14.006 ccw(c5.627,14.15) 5.771,14.293 5.621,14.443 cw(c5.765,14.587) 5.621,14.73 cw(c5.765,14.587) 5.908,14.73 6.058,14.58 ccw(c6.202,14.724) 6.345,14.58 ccw(c6.202,14.724) 6.345,14.867 6.195,15.017 cw(c6.339,15.161) 6.195,15.304 6.761,15.87 8.077,17.186 8.077,18.136 9.728,19.787 11.858,19.787 R38.2@12.89,18.755
VGA_B4: P3.17 R42.2 | length 17.6
  Top Layer w0.152: P3.17@1.016,12.125 1.997,13.106 3.567,13.106 7.747,17.286 7.747,18.263 9.627,20.142 12.741,20.142 R42.2@14.129,18.755
VGA_G: J4.2 R23.2 R29.1 R30.1 R31.1 R32.1 | length 8.8
  Top Layer w0.8: R29.1@17.323,17.755 R30.1@18.561,17.755 R31.1@19.799,17.755 R32.1@21.038,17.755 R23.2@22.276,17.755 22.276,14.021 J4.2@22.225,13.97
VGA_G1: P3.16 R29.2 | length 23.6
  Top Layer w0.152: P3.16@3.016,14.125 3.064,14.173 3.637,14.746 cw(c3.781,14.602) 3.924,14.746 4.101,14.569 ccw(c4.245,14.712) 4.389,14.569 ccw(c4.245,14.712) 4.389,14.856 4.211,15.033 cw(c4.355,15.177) 4.211,15.32 cw(c4.355,15.177) 4.498,15.32 4.676,15.143 ccw(c4.819,15.286) 4.963,15.143 ccw(c4.819,15.286) 4.963,15.43 4.785,15.607 cw(c4.929,15.751) 4.785,15.894 cw(c4.929,15.751) 5.072,15.894 5.25,15.717 ccw(c5.393,15.86) 5.537,15.717 ccw(c5.393,15.86) 5.537,16.004 5.359,16.181 cw(c5.503,16.325) 5.359,16.468 cw(c5.503,16.325) 5.647,16.468 5.824,16.291 ccw(c5.967,16.435) 6.111,16.291 ccw(c5.967,16.435) 6.111,16.578 5.934,16.756 cw(c6.077,16.899) 5.934,17.043 cw(c6.077,16.899) 6.221,17.043 6.398,16.865 ccw(c6.542,17.009) 6.685,16.865 ccw(c6.542,17.009) 6.685,17.152 6.508,17.33 cw(c6.651,17.473) 6.508,17.617 cw(c6.651,17.473) 6.795,17.617 6.972,17.439 ccw(c7.116,17.583) 7.259,17.439 ccw(c7.116,17.583) 7.259,17.727 7.082,17.904 cw(c7.226,18.047) 7.082,18.191 9.567,20.676 15.402,20.676 R29.2@17.323,18.755
VGA_G2: P3.15 R30.2 | length 23.6
  Top Layer w0.152: P3.15@1.016,14.125 2.029,15.138 3.531,15.138 4.47,16.078 ccw(c4.327,16.222) 4.47,16.365 4.231,16.604 cw(c4.375,16.748) 4.231,16.891 cw(c4.375,16.748) 4.518,16.891 4.757,16.652 ccw(c4.901,16.796) 5.045,16.652 ccw(c4.901,16.796) 5.045,16.939 4.806,17.179 cw(c4.949,17.322) 4.806,17.466 cw(c4.949,17.322) 5.093,17.466 5.332,17.227 ccw(c5.475,17.37) 5.619,17.227 5.626,17.234 9.398,21.006 16.31,21.006 R30.2@18.561,18.755
VGA_G3: P3.14 R31.2 | length 23.6
  Top Layer w0.152: P3.14@3.016,16.125 4.609,17.718 5.407,18.516 cw(c5.55,18.372) 5.694,18.516 5.844,18.366 ccw(c5.988,18.509) 6.131,18.366 ccw(c5.988,18.509) 6.131,18.653 5.981,18.803 cw(c6.125,18.947) 5.981,19.09 cw(c6.125,18.947) 6.268,19.09 6.418,18.94 ccw(c6.562,19.083) 6.706,18.94 ccw(c6.562,19.083) 6.706,19.227 6.555,19.377 cw(c6.699,19.521) 6.555,19.664 cw(c6.699,19.521) 6.842,19.664 6.993,19.514 ccw(c7.136,19.658) 7.28,19.514 ccw(c7.136,19.658) 7.28,19.801 7.129,19.951 cw(c7.273,20.095) 7.129,20.238 cw(c7.273,20.095) 7.417,20.238 7.567,20.088 ccw(c7.71,20.232) 7.854,20.088 ccw(c7.71,20.232) 7.854,20.375 7.704,20.526 cw(c7.847,20.669) 7.704,20.813 7.847,20.956 8.134,21.243 8.278,21.387 17.167,21.387 R31.2@19.799,18.755
VGA_G4: P3.13 R32.2 | length 23.6
  Top Layer w0.152: P3.13@1.016,16.125 2.011,17.12 3.48,17.12 8.128,21.768 18.024,21.768 R32.2@21.038,18.755
VGA_HSYNC: P3.7 R35.1 | length 24.5
  Bottom Layer w0.152: P3.7@1.016,22.125 2.008,21.133 3.988,21.133 4.521,20.599 4.521,7.823 8.306,4.039 R35.1@10.574,4.039
VGA_R: J4.1 R17.1 R19.1 R20.2 R22.1 R25.1 | length 8.9
  Top Layer w0.8: J4.1@24.511,13.97 24.282,14.199 24.282,17.628 R17.1@24.155,17.755 R19.1@25.394,17.755 R22.1@26.632,17.755 R25.1@27.87,17.755 R20.2@29.108,17.755
VGA_R1: P3.12 R17.2 | length 29
  Top Layer w0.152: P3.12@3.016,18.125 4.498,19.607 4.504,19.613 cw(c4.648,19.47) 4.792,19.613 5.024,19.381 ccw(c5.168,19.524) 5.311,19.381 ccw(c5.168,19.524) 5.311,19.668 5.079,19.901 cw(c5.222,20.044) 5.079,20.188 cw(c5.222,20.044) 5.366,20.188 5.598,19.955 ccw(c5.742,20.099) 5.885,19.955 ccw(c5.742,20.099) 5.885,20.242 5.653,20.475 cw(c5.796,20.618) 5.653,20.762 cw(c5.796,20.618) 5.94,20.762 6.172,20.529 ccw(c6.316,20.673) 6.46,20.529 ccw(c6.316,20.673) 6.46,20.816 6.227,21.049 cw(c6.371,21.192) 6.227,21.336 7.04,22.149 23.186,22.149 24.155,21.18 R17.2@24.155,18.755
VGA_R2: P3.10 R19.2 | length 29.1
  Top Layer w0.152: P3.10@3.016,20.125 4.586,20.125 4.705,20.244 ccw(c4.561,20.387) 4.705,20.531 3.987,21.248 cw(c4.131,21.392) 3.987,21.535 cw(c4.131,21.392) 4.274,21.535 4.992,20.818 ccw(c5.135,20.962) 5.279,20.818 ccw(c5.135,20.962) 5.279,21.105 5.18,21.204 cw(c5.324,21.348) 5.18,21.491 cw(c5.324,21.348) 5.467,21.491 5.566,21.392 ccw(c5.71,21.536) 5.853,21.392 5.997,21.536 6.175,21.714 6.94,22.479 23.286,22.479 25.394,20.371 R19.2@25.394,18.755
VGA_R3: P3.8 R22.2 | length 29.1
  Top Layer w0.152: P3.8@3.016,22.125 3.7,22.809 3.886,22.809 4.089,22.809 4.292,22.809 cw(c4.292,22.606) 4.495,22.606 4.495,22.081 ccw(c4.698,22.081) 4.698,21.878 ccw(c4.698,22.081) 4.901,22.081 4.901,22.606 cw(c5.104,22.606) 5.104,22.809 cw(c5.104,22.606) 5.307,22.606 5.307,22.081 ccw(c5.51,22.081) 5.51,21.878 ccw(c5.51,22.081) 5.713,22.081 5.713,22.606 cw(c5.916,22.606) 5.916,22.809 6.119,22.809 6.96,22.809 23.386,22.809 26.632,19.563 R22.2@26.632,18.755
VGA_R4: P3.5 R25.2 | length 29.1
  Top Layer w0.152: P3.5@1.016,24.125 2.027,23.114 23.511,23.114 R25.2@27.87,18.755
VGA_VSYNC: P3.6 R39.1 | length 22.4
  Bottom Layer w0.152: P3.6@3.016,24.125 5.41,21.731 5.41,9.398 9.119,5.69 R39.1@10.582,5.69
pads on no net: J4.0 J4.4 J4.9 J4.11 J4.12 J4.15 J6. J6.A8 J6.B8 J8.0 J8.6 J9.0 P3.9 RJ1. U1.30 U2.9 U2.12 U2.29 U2.31 U2.32 U4.4 U4.5 U5.4 USB1.0 USB1.4

## Polygon pours and split planes (outlines as drawn)
AGND on Bottom Layer "Bottom Layer-No Net" (solid, remove dead copper, pour order 0): 12.476,34.671 17.45,34.671 17.983,35.204 18.11,35.331 19.914,35.331 34.595,35.331 36.246,33.68 41.25,28.677 45.745,28.677 46.965,29.896 46.965,33.477 46.965,45.237 46.177,46.025 44.602,46.025 38.329,46.025 35.204,42.901 34.874,42.57 19.279,42.57 15.85,42.57 13.386,45.034 11.227,45.034 10.465,44.272 10.465,36.709
GND on Bottom Layer "Bottom Layer-No Net" (solid, remove dead copper, pour order 8): 0,0 50,0 50,100.025 0,100.025
GND on Top Layer "Bottom Layer-No Net" (solid, remove dead copper, pour order 2): 0,-0.008 50.002,-0.008 50.002,100.017 0,100.017

## Keep-outs
Keep-Out Layer:
  the board outline again, w0.254

## Other copper
Top Layer:
  pour cut-out: 28.423,76.962 28.346,76.886 28.346,60.985 48.362,60.985 47.981,61.366 47.981,76.937
  pour cut-out: 1.118,93.421 1.118,78.892 1.168,78.842 48.793,78.842 48.793,93.294 48.717,93.37
  region net USB_5V: 40.615,58.014 40.64,57.988 41.478,57.988 41.707,58.217 41.707,59.055 41.504,59.258 40.742,59.258 40.488,59.004 40.488,58.585
  region net VCC_12V: 31.75,24.816 31.801,24.765 32.487,24.765 37.541,19.71 38.786,19.71 39.802,20.726 39.802,23.343 40.513,24.054 40.488,24.079 40.488,24.295 40.424,24.295 40.081,24.638 34.188,24.638 33.045,25.781 31.801,25.781 31.521,25.502
  region net VCC_12V: 31.521,28.372 31.521,25.222 31.699,25.044 31.725,25.07 32.283,25.07 32.283,25.197 32.461,25.375 32.385,25.451 32.385,28.311 32.385,28.372
  region net NetC42_2: 32.055,29.54 31.242,29.54 30.709,30.074 30.353,29.718 30.353,28.778 30.696,28.435 31.217,28.956 32.131,28.956 32.334,29.159 32.334,29.413
  region net VCC_3.3V: 23.876,28.981 23.749,28.854 23.749,24.994 24.308,24.435 29.413,24.435 29.642,24.663 29.642,25.298 29.21,25.73 29.159,25.679 26.391,25.679 25.349,26.721 25.349,28.575 24.638,29.286
Bottom Layer:
  pour cut-out: 28.423,76.962 28.346,76.886 28.346,60.985 48.362,60.985 47.981,61.366 47.981,76.937

## Silkscreen, mask and mechanical layers (free items; w line width, h text height)
Top Overlay:
  text "88E1512_1.25G SFP" at 1.295,97.485 h2.5
  text "Artificer  Rev00" at 23.927,95.987 h3.2
  text "2020-10-29" at 1.245,95.072 h2.5
  text "5.0V" at 24.028,56.82 h2.2
  text "TXD" at 24.028,54.778 h2.2
  text "RXD" at 24.028,52.763 h2.2
  text "GND" at 24.028,50.775 h2.2
  text "开" at 43.383,24.003 h2.5
  text "DC:5-16V" at 36.627,5.461 h2.5

## Text inside footprints (layer, text, board x,y; h text height)
C46: Top Overlay "+" at 29.058,26.264 h0.75 r90